# Altium PCB PCB1.PcbDoc (part 2 of 3)
Units mil, origin at the board's own origin, x right, y up, seen from the top; angles counter-clockwise.
Board outline 7874.02 x 3937.01 mil, 2 copper layers (Top Layer, Bottom Layer); 455 components, 299 nets, 1238 pads, 79 vias.
Unrouted connection lines stored in the file: 632.
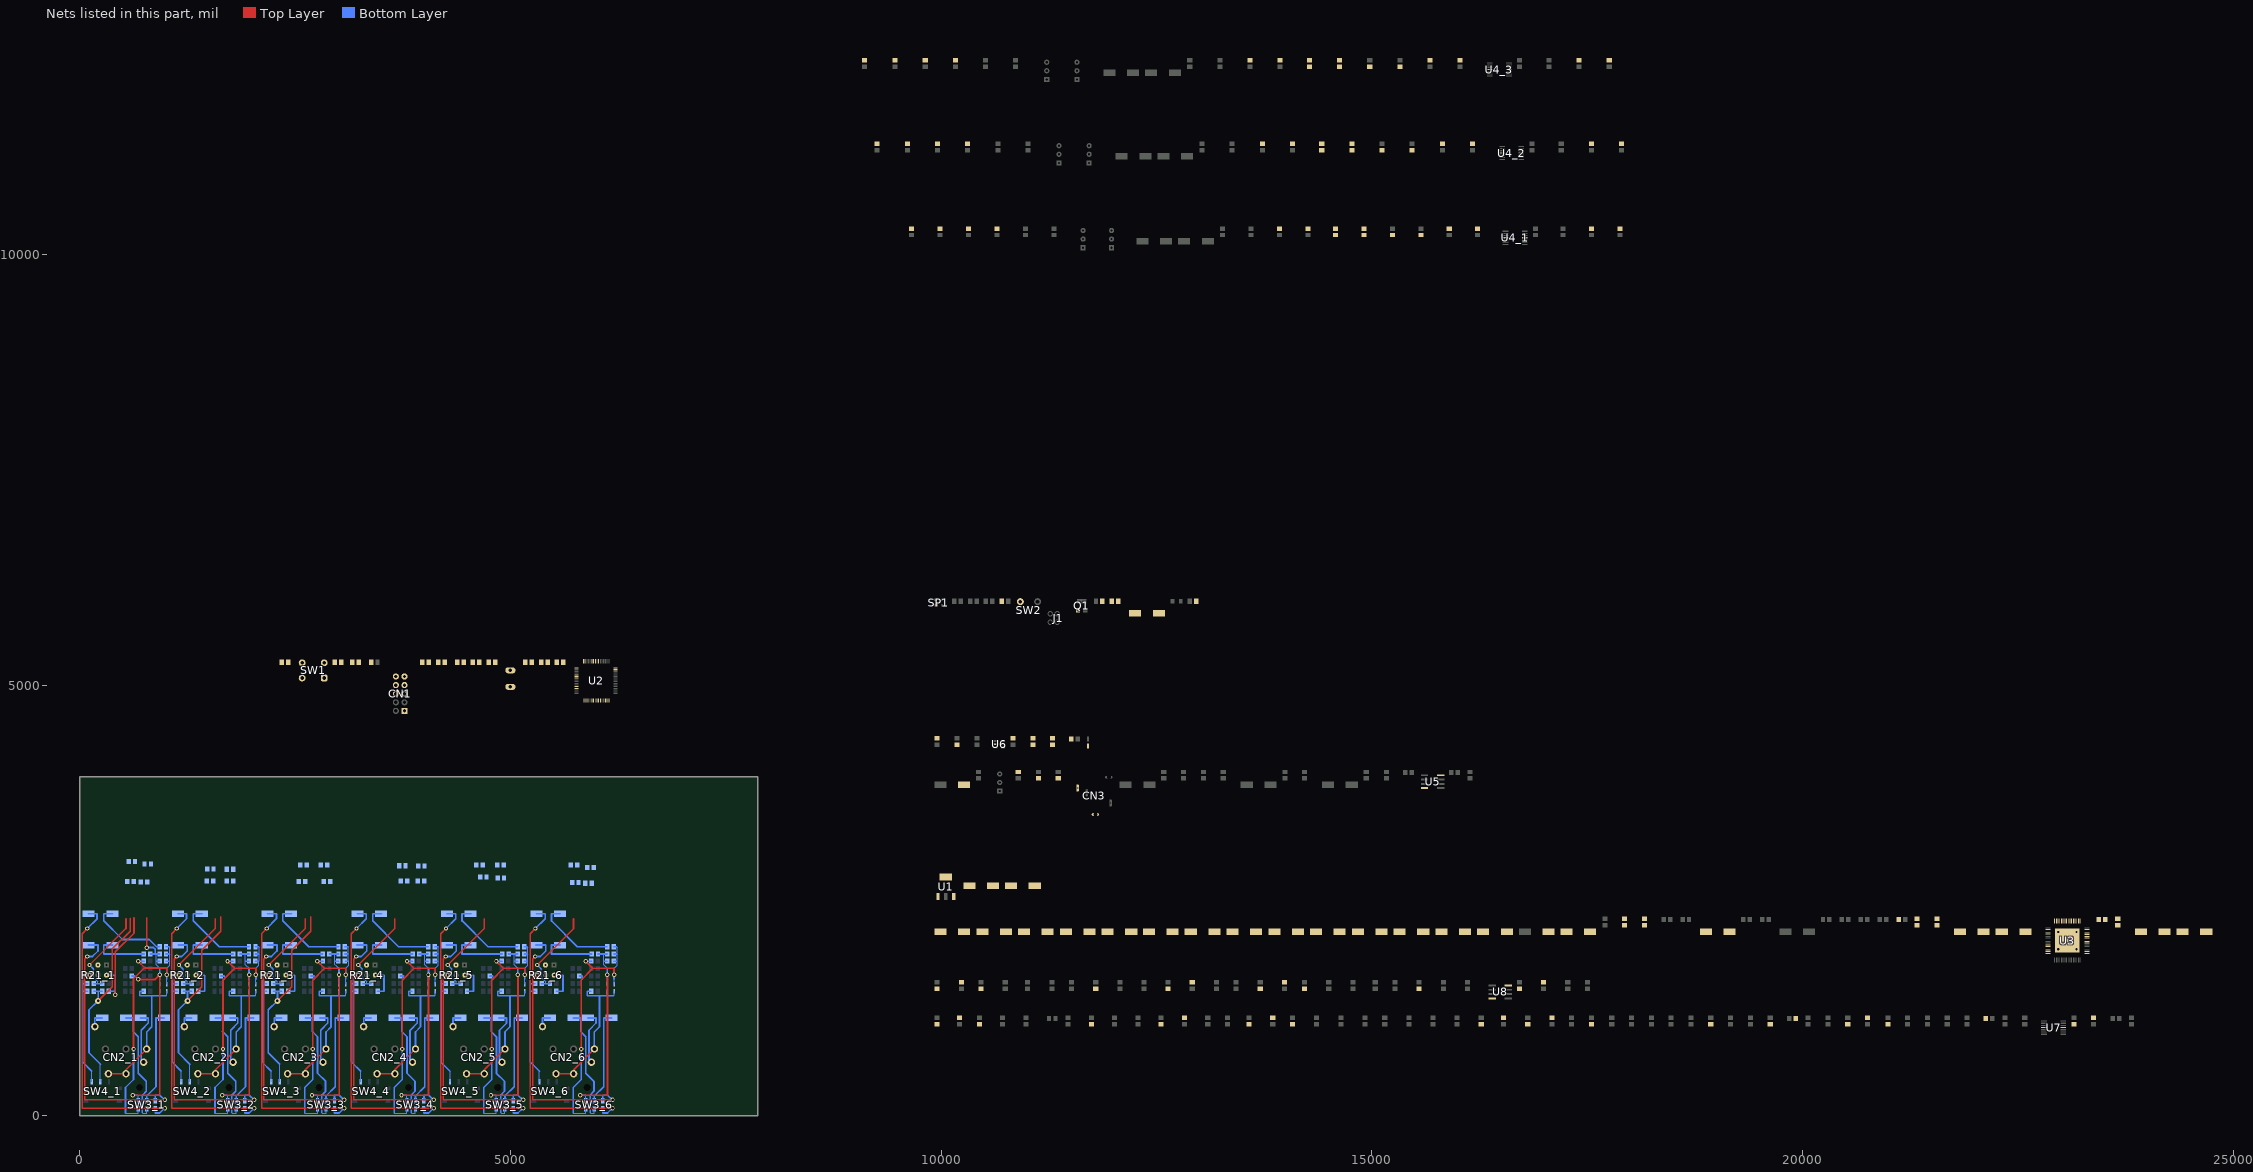
[diagram p2: the nets of this part, all layers, seen from the top]

## Part data
C3 C4 C5 C6 C7 C8 C9 C10 C11 C12 C13 C15 C17_1 C17_2 C17_3 C17_4 C17_5 C17_6 C21 C22 C25 C26 C29 C30 C49_1 C49_2 C49_3 C49_4 C49_5 C49_6 C50_1 C50_2 C50_3 C50_4 C50_5 C50_6 C51_1 C51_2 C51_3 C52_1 C52_2 C52_3 C53_1 C53_2 C53_3 C54_1 C54_2 C54_3 C55_1 C55_2 C55_3 C56_1 C56_2 C56_3 C59_1 C59_2 C59_3 C60_1 C60_2 C60_3 C61 C63 C66 C68 C69 C70 C71 C72 C73 C74 C75 C76 C77 C78 C79 C80 C81 C82 C83 C84 C85 C86 C87 C88 C89_1 C89_2 C89_3 C89_4 C89_5 C89_6 C90_1 C90_2 C90_3 C90_4 C90_5 C90_6 C91_1 C91_2 C91_3 C91_4 C91_5 C91_6 C92_1 C92_2 C92_3 C92_4 C92_5 C92_6 C93_1 C93_2 C93_3 C93_4 C93_5 C93_6: "Capacitor de placas paralelas", tolerancia=X7R, Encapsulado=0805, tension=25V, Valor=100nF
CN1: "STLINK V2 Mini"
D1: library part Led, Color=Verde, Cod. Proveedor=67-1549-1-ND, Encapsulado=SMD, Link=https://www.digikey.com/product-detail/es/SML-LX0603GW-TR/67-1549-1-ND/304360?utm_campaign=buynow&WT.z_cid=ref_octopart_dkc_buynow&utm_medium=aggregator&curr=usd&site=us&utm_source=octopart, Proveedor=Digi-Key
D2 D3_1 D3_2 D3_3 D3_4 D3_5 D3_6 D4_1 D4_2 D4_3 D4_4 D4_5 D4_6: library part "Schottky Diode", Cod. Proveedor=1727-5845-1-ND, Encapsulado=SOD-128, Fabricante=Nexperia, Link=https://www.digikey.com/product-detail/es/PMEG6010EP,115/1727-5845-1-ND/2697507?utm_campaign=buynow&WT.z_cid=ref_octopart_dkc_buynow&utm_medium=aggregator&curr=usd&site=us&utm_source=octopart, Proveedor=Digi-Key
J1: "Conector micro USB tipo B", Cod. Proveedor=CO4821095, Encapsulado="SMD B TYPE SIDE ENTRY", Proveedor=Elemon
L1: library part Inductor, Cod. Proveedor=478-7137-1-ND, Encapsulado=SMD, Fabricante="AVX Corporation", Link=https://www.digikey.com/product-detail/es/L0201R68AHSTR/500/478-7137-1-ND/3455469?utm_campaign=buynow&WT.z_cid=ref_octopart_dkc_buynow&utm_medium=aggregator&curr=usd&site=us&utm_source=octopart, Proveedor=Digi-Key, Valor=0.68nH
Q1: library part NPN, "NPN", Cod. Proveedor=1727-2918-1-ND, Encapsulado=TO-236AB, Fabricante="Nexperia USA Inc.", Link=https://www.digikey.com/products/es?keywords=1727-2918-1-ND, Proveedor=Digi-Key
R1 R8_1 R8_2 R8_3 R8_4 R8_5 R8_6 R9_1 R9_2 R9_3 R9_4 R9_5 R9_6 R10_1 R10_2 R10_3 R10_4 R10_5 R10_6 R24_1 R24_2 R24_3 R25_1 R25_2 R25_3 R26_1 R26_2 R26_3 R27_1 R27_2 R27_3 R28_1 R28_2 R28_3 R29_1 R29_2 R29_3 R30_1 R30_2 R30_3 R31_1 R31_2 R31_3 R34_1 R34_2 R34_3 R35_1 R35_2 R35_3 R36_1 R36_2 R36_3 R37_1 R37_2 R37_3 R38 R39 R40 R41 R42 R43 R44 R45 R46 R47 R48 R50 R75 R78 R81 R82 R83 R84 R85 R86 R87 R88 R89 R92 R93 R94 R95 R96 R97 R98 R99 R100 R103 R104 R105 R106 R107 R108 R109 R110 R111 R114 R115 R116 R117 R118 R119 R120 R121 R122 R125 R126 R127 R128 R129 R130 R131 R132 R133 R136 R137 R138 R139 R140 R141 R142 R143: "Resistencia", tolerancia=10%, Potencia=1/4W
  R1: Valor=10K
  R8_1 R8_2 R8_3 R8_4 R8_5 R8_6 R34_1 R34_2 R34_3 R35_1 R35_2 R35_3 R39 R43 R47 R81 R85 R92 R97 R103 R107 R114 R118 R125 R129 R136 R140: Valor=1K
  R9_1 R9_2 R9_3 R9_4 R9_5 R9_6: Valor=15K
  R10_1 R10_2 R10_3 R10_4 R10_5 R10_6: Valor=8K2
  R24_1 R24_2 R24_3 R25_1 R25_2 R25_3 R28_1 R28_2 R28_3 R29_1 R29_2 R29_3 R30_1 R30_2 R30_3 R31_1 R31_2 R31_3: Valor=1K5
  R26_1 R26_2 R26_3 R27_1 R27_2 R27_3 R36_1 R36_2 R36_3 R37_1 R37_2 R37_3 R84 R95 R106 R117 R128 R139: Valor=47
  R38 R48 R78 R88 R89 R96 R100 R110 R111 R121 R122 R132 R133 R143: Valor=5K6
  R40 R44 R82 R86 R93 R98 R104 R108 R115 R119 R126 R130 R137 R141: Valor=6K8
  R41 R45: Valor=360R
  R42: Valor=4K7
  R46: Valor=47R
  R50: Valor=100R
  R75: Valor=1M
  R83 R87 R94 R99 R105 R109 R116 R120 R127 R131 R138 R142: Valor=360
R2 R3 R4 R5 R6 R7 R11 R22_1 R22_2 R22_3 R22_4 R22_5 R22_6 R23_1 R23_2 R23_3 R23_4 R23_5 R23_6 R51 R52 R53 R54 R55 R56 R57 R58 R59 R60 R61 R62 R63 R64 R65 R66 R67 R68 R69 R70 R71 R72 R73 R74 R76 R77 R79 R80 R90 R91 R101 R102 R112 R113 R123 R124 R134 R135 R144_1 R144_2 R144_3 R144_4 R144_5 R144_6 R145_1 R145_2 R145_3 R145_4 R145_5 R145_6 R146_1 R146_2 R146_3 R146_4 R146_5 R146_6 R147_1 R147_2 R147_3 R147_4 R147_5 R147_6: "Resistencia", tolerancia=5%
  R2: Potencia=1/10W, Valor=330R
  R3: Potencia=1/10W, Valor=47k
  R4 R5 R6 R7: Potencia=1/10W, Valor=22R
  R11: Potencia=1/10W, Valor=220K
  R22_1 R22_2 R22_3 R22_4 R22_5 R22_6 R144_1 R144_2 R144_3 R144_4 R144_5 R144_6 R147_1 R147_2 R147_3 R147_4 R147_5 R147_6: Potencia=1/4W, Valor=1K
  R23_1 R23_2 R23_3 R23_4 R23_5 R23_6: Potencia=1/4W, Valor=15K
  R51 R52 R53 R54 R55 R56 R57 R58 R59 R60 R61 R62 R63 R64 R65 R66 R67 R68 R69 R70 R71 R72 R73 R74 R79 R80 R90 R91 R101 R102 R112 R113 R123 R124 R134 R135: Potencia=1/4W, Valor=1M
  R76: Potencia=1/4W, Valor=33K
  R77: Potencia=1/4W, Valor=1K8
  R145_1 R145_2 R145_3 R145_4 R145_5 R145_6: Potencia=1/4W, Valor=6K8
  R146_1 R146_2 R146_3 R146_4 R146_5 R146_6: Potencia=1/4W, Valor="6 K8"
R12 R13 R14 R15 R16 R17 R18 R19 R20: "Resistencia", Potencia=1/10W, Valor=100R
R21_1 R21_2 R21_3 R21_4 R21_5 R21_6 R32_1 R32_2 R32_3 R33_1 R33_2 R33_3 R49: library part Potenciometer, tolerancia=10%, Potencia=1/4W, Valor=10K
SP1: library part "Double ESD", "Double rail-to-rail ESD protection diode", Cod. Proveedor=1727-3884-1-ND, Encapsulado=SOT-143B, Link=https://www.digikey.com/product-detail/es/PRTR5V0U2X,215/1727-3884-1-ND/1589981?utm_campaign=buynow&WT.z_cid=ref_octopart_dkc_buynow&utm_medium=aggregator&curr=usd&site=us&utm_source=octopart, Proveedor=Digi-Key
SW1 SW5_1 SW5_2 SW5_3 SW5_4 SW5_5 SW5_6: "Pulsador de 4 pines"
  SW5_1 SW5_2 SW5_3 SW5_4 SW5_5 SW5_6: Cod. Proveedor=GH1365-ND, Encapsulado="Montaje en panel, posterior", Fabricante="Grayhill Inc.", Link=https://www.digikey.com/product-detail/es/30-3/GH1365-ND/686796?utm_campaign=buynow&WT.z_cid=ref_octopart_dkc_buynow&utm_medium=aggregator&curr=usd&site=us&utm_source=octopart, Proveedor=Digi-Key
SW4_1 SW4_2 SW4_3 SW4_4 SW4_5 SW4_6: library part SWITCH_3, "Pulsador de 4 pines", Cod. Proveedor=563-1246-1-ND, Encapsulado=SMD, Fabricante="Nidec Copal Electronics", Link=https://www.digikey.com/product-detail/en/nidec-copal-electronics/CFPA-1FB4-A2T/563-1246-1-ND/2357767, Proveedor=Digi-Key
U1: "LDO Regulator", Cod. Proveedor=LM1117IMP-ADJ/NOPBCT-ND, Encapsulado=SOT-223-4, Fabricante="Texas Instruments", Link=https://www.digikey.com/product-detail/es/LM1117IMP-ADJ-NOPB/LM1117IMP-ADJ-NOPBCT-ND/483060?utm_campaign=buynow&WT.z_cid=ref_octopart_dkc_buynow&utm_medium=aggregator&curr=usd&site=us&utm_source=octopart, Proveedor=Digi-Key
U2: library part STM32F4xxR2, Manufacturer=STMicroelectronics, Manufacturer_Part_Number=stm32f4xxr2, _BOOT0="conectado a VDD o DGND a traves de R=10K", _BOOT0=0="0: Main Flash memory is selected as boot space", _BOOT0=1="1: System memory is selected as boot space", _VDD="Capa de 100nF", Cod. Proveedor=497-17428-ND, Encapsulado=64-LQFP, Link=https://www.digikey.com/product-detail/es/STM32F401RBT6/497-17428-ND/4755972?utm_campaign=buynow&WT.z_cid=ref_octopart_dkc_buynow&utm_medium=aggregator&curr=usd&site=us&utm_source=octopart, Proveedor=Digi-Key, Vendor=STMicroelectronics
U3: library part PCM3168A-Q1_PAP_, Manufacturer="Texas Instruments", Manufacturer_Part_Number=PCM3168A-Q1_PAP_64, Vendor="Texas Instruments"
U4_1 U4_2 U4_3 U7: library part Opamp_x4, "Integrado con 4 operacionales", Cod. Proveedor=296-22024-1-ND, Encapsulado=8-SOIC, Fabricante="Texas Instruments", Link=https://www.digikey.com/product-detail/es/OPA2134UA-2K5/296-22024-1-ND/301154?utm_campaign=buynow&WT.z_cid=ref_octopart_dkc_buynow&utm_medium=aggregator&curr=usd&site=us&utm_source=octopart, Proveedor=Digi-Key
U5: "Integrado con 2 operacionales"
U6: "Low IQ Boost/SEPIC/Inverting Converter with 1A, 60V Switch", Cod. Proveedor=LT8330ES6#TRMPBFCT-ND, Encapsulado=TSOT-23-6, Fabricante="Linear Technology/Analog Devices", Link=https://www.digikey.com/product-detail/es/LT8330ES6%2523TRMPBF/LT8330ES6%2523TRMPBFCT-ND/5361671?utm_campaign=buynow&WT.z_cid=ref_octopart_dkc_buynow&utm_medium=aggregator&curr=usd&site=us&utm_source=octopart, Proveedor=Digi-Key
U8: library part Opamp_x2, "Integrado con 2 operacionales", Cod. Proveedor=296-22024-1-ND, Encapsulado=8-SOIC, Fabricante="Texas Instruments", Link=https://www.digikey.com/product-detail/es/OPA2134UA-2K5/296-22024-1-ND/301154?utm_campaign=buynow&WT.z_cid=ref_octopart_dkc_buynow&utm_medium=aggregator&curr=usd&site=us&utm_source=octopart, Proveedor=Digi-Key
Y1: "Resonador cerámico", frecuencia=8MHZ
C1 C2 C14 C16_1 C16_2 C16_3 C16_4 C16_5 C16_6 C18_1 C18_2 C18_3 C18_4 C18_5 C18_6 C19 C20 C23 C24 C27 C28 C31 C32 C33 C34 C35 C36 C37 C38 C39 C40 C41 C42 C43 C44 C45 C46 C47_1 C47_2 C47_3 C47_4 C47_5 C47_6 C48_1 C48_2 C48_3 C48_4 C48_5 C48_6 C57_1 C57_2 C57_3 C58_1 C58_2 C58_3 C62 C64 C65 C67: tension=16V, Valor=10uF
SW2: Cod. Proveedor=EG2615-ND, Encapsulado=SMD, Fabricante=E-Switch, Link=https://www.digikey.com/product-detail/en/e-switch/800SP9B6M6RE/EG2615-ND/502079, Proveedor=Digi-Key
SW3_1 SW3_2 SW3_3 SW3_4 SW3_5 SW3_6: Cod. Proveedor=CKN10722TR-ND, Encapsulado=SMD, Fabricante=C&K, Link=https://www.digikey.com/product-detail/en/c-k/JS202011JAQN/CKN10722TR-ND/6137629, Proveedor=Digi-Key

## Via types
v1: diameter 50, hole 28, Top Layer to Bottom Layer, 69 vias
v2: diameter 70, hole 28, Top Layer to Bottom Layer, 6 vias
v3: diameter 55.12, hole 27.56, Top Layer to Bottom Layer, 4 vias

## Nets (pads, with @x,y where several pads share a name; then routed paths per layer and width w, separated by ;. In a path a pad name is that pad's centre, name@x,y a point inside that pad or via, vN(x,y) a via of type N, cw(c..) or ccw(c..) an arc to the next point about the centre after c; other vN are vias at no path point)
3V3: C2.1 U1.4
3V3_D: C3.1 C4.1 C7.1 C8.1 C9.1 C10.1 C20.1 C22.1 C24.1 C26.1 CN1.7 CN1.8 R2.2 R21_1.3 R21_2.3 R21_3.3 R21_4.3 R21_5.3 R21_6.3 R22_1.2 R22_2.2 R22_3.2 R22_4.2 R22_5.2 R22_6.2 U2.1 U2.13 U2.19 U2.32 U2.48 U2.64 U3.4 U3.12 U3.42 U3.46 | length 3200.6
  Top Layer w20: v1(413.39,1407.48) 413.39,1904.53 629.92,2121.06 629.92,2298.23
  Bottom Layer w20: R21_1.3@312.72,1633.86 413.39,1633.86 413.39,1446.85 ; R22_1.2@337.6,1446.85 413.39,1446.85 ; v1(413.39,1407.48) 413.39,1446.85 ; R21_2.3@1351.11,1633.86 1451.77,1633.86 1451.77,1446.85 R22_2.2@1375.98,1446.85 ; R21_3.3@2394.41,1633.86 2495.08,1633.86 2495.08,1446.85 R22_3.2@2419.29,1446.85 ; R21_4.3@3432.8,1633.86 3533.46,1633.86 3533.46,1446.85 R22_4.2@3457.68,1446.85 ; R21_5.3@4471.19,1633.86 4571.85,1633.86 4571.85,1446.85 R22_5.2@4496.06,1446.85 ; R21_6.3@5509.57,1633.86 5610.24,1633.86 5610.24,1446.85 R22_6.2@5534.45,1446.85
5V: C1.1 C14.1 C15.1 C19.1 C21.1 C23.1 C25.1 C28.1 C29.1 C30.1 C68.1 CN1.9 CN1.10 L1.1 R3.2 R4.1 R51.1 R53.1 R55.1 R57.1 R59.1 R61.1 R63.1 R65.1 R67.1 R69.1 R71.1 R73.1 R79.1 R90.1 R101.1 R112.1 R123.1 R134.1 SP1.4 SW2.2 U1.3 U3.3 U3.14 U3.34 U3.49 U4_1.4 U4_2.4 U4_3.4 U5.4 U6.4 U6.6 U7.4 U8.8
48V: C69.1 D2.1 R75.2 SW5_1.2 SW5_2.2 SW5_3.2 SW5_4.2 SW5_5.2 SW5_6.2
AGND: C1.2 C2.2 C19.2 C21.2 C23.2 C25.2 C28.2 C29.2 C30.2 C31.2 C32.2 C35.2 C36.2 C59_1.2 C59_2.2 C59_3.2 C60_1.2 C60_2.2 C60_3.2 C66.2 C67.2 C68.2 C69.2 C70.2 C73.2 C77.2 C79.2 C82.2 C85.2 C88.2 C91_1.2 C91_2.2 C91_3.2 C91_4.2 C91_5.2 C91_6.2 CN2_1.1 CN2_1.G CN2_1.S CN2_2.1 CN2_2.G CN2_2.S CN2_3.1 CN2_3.G CN2_3.S CN2_4.1 CN2_4.G CN2_4.S CN2_5.1 CN2_5.G CN2_5.S CN2_6.1 CN2_6.G CN2_6.S CN3.1 CN3.2 D3_1.2 D3_2.2 D3_3.2 D3_4.2 D3_5.2 D3_6.2 D4_1.2 D4_2.2 D4_3.2 D4_4.2 D4_5.2 D4_6.2 R47.1 R48.1 R52.2 R54.2 R56.2 R58.2 R60.2 R62.2 R64.2 R66.2 R68.2 R70.2 R72.2 R74.2 R77.1 R80.2 R88.1 R91.2 R100.1 R102.2 R110.1 R113.2 R121.1 R124.2 R132.1 R135.2 R143.1 U1.1 U3.2 U3.16 U3.33 U3.39 U3.40 U3.43 U3.44 U3.45 U3.50 U3.EPAD U4_1.11 U4_2.11 U4_3.11 U5.8 U6.2 U7.11 U8.4 | length 10359.5
  Top Layer w20: CN2_1.S@332.8,489.28 CN2_1.G@537.8,489.28 537.8,536.28 CN2_1.1@777.8,776.28 ; CN2_2.S@1371.18,489.28 CN2_2.G@1576.18,489.28 1576.18,536.28 CN2_2.1@1816.18,776.28 ; CN2_3.S@2414.49,489.28 CN2_3.G@2619.49,489.28 2619.49,536.28 CN2_3.1@2859.49,776.28 ; CN2_4.S@3452.87,489.28 CN2_4.G@3657.87,489.28 3657.87,536.28 CN2_4.1@3897.87,776.28 ; CN2_5.S@4491.26,489.28 CN2_5.G@4696.26,489.28 4696.26,536.28 CN2_5.1@4936.26,776.28 ; CN2_6.S@5529.65,489.28 CN2_6.G@5734.65,489.28 5734.65,536.28 CN2_6.1@5974.65,776.28
  Bottom Layer w10: 930.12,1397.64 D3_1.2@930.12,1445.97 ; 1003.94,1397.64 1008.86,1402.56 D4_1.2@1008.86,1445.97 ; 1966.54,1397.64 D3_2.2@1966.54,1445.97 ; 2040.35,1397.64 2045.28,1402.56 D4_2.2@2045.28,1445.97 ; 3009.84,1397.64 D3_3.2@3009.84,1445.97 ; 3083.66,1397.64 3088.58,1402.56 D4_3.2@3088.58,1445.97 ; 4048.23,1397.64 D3_4.2@4048.23,1445.97 ; 4122.05,1397.64 4126.97,1402.56 D4_4.2@4126.97,1445.97 ; 5086.61,1397.64 D3_5.2@5086.61,1445.97 ; 5160.43,1397.64 5165.35,1402.56 D4_5.2@5165.35,1445.97 ; 6125,1397.64 D3_6.2@6125,1445.97 ; 6198.82,1397.64 6203.74,1402.56 D4_6.2@6203.74,1445.97
  Bottom Layer w15: C91_1.2@745.08,1446.85 698.82,1446.85 698.82,1397.64 930.12,1397.64 1003.94,1397.64 ; C91_2.2@1781.5,1446.85 1735.24,1446.85 1735.24,1397.64 1966.54,1397.64 2040.35,1397.64 ; C91_3.2@2824.8,1446.85 2778.54,1446.85 2778.54,1397.64 3009.84,1397.64 3083.66,1397.64 ; C91_4.2@3863.19,1446.85 3816.93,1446.85 3816.93,1397.64 4048.23,1397.64 4122.05,1397.64 ; C91_5.2@4901.57,1446.85 4855.31,1446.85 4855.31,1397.64 5086.61,1397.64 5160.43,1397.64 ; C91_6.2@5939.96,1446.85 5893.7,1446.85 5893.7,1397.64 6125,1397.64 6198.82,1397.64
  Bottom Layer w20: CN2_1.1@777.8,776.28 777.8,974.65 836.61,1033.46 836.61,1387.8 ; CN2_2.1@1816.18,776.28 1816.18,974.65 1875,1033.46 1875,1387.8 ; CN2_3.1@2859.49,776.28 2859.49,974.65 2918.31,1033.46 2918.31,1387.8 ; CN2_4.1@3897.87,776.28 3897.87,974.65 3956.69,1033.46 3956.69,1387.8 ; CN2_5.1@4936.26,776.28 4936.26,974.65 4995.08,1033.46 4995.08,1387.8 ; CN2_6.1@5974.65,776.28 5974.65,974.65 6033.46,1033.46 6033.46,1387.8
  other v3: 22970,1935 23180,1935 22970,2135 23180,2135
DGND: C3.2 C4.2 C5.1 C6.1 C7.2 C8.2 C9.2 C10.2 C11.2 C12.2 C13.2 C14.2 C15.2 C20.2 C22.2 C24.2 C26.2 C49_1.2 C49_2.2 C49_3.2 C49_4.2 C49_5.2 C49_6.2 C50_1.2 C50_2.2 C50_3.2 C50_4.2 C50_5.2 C50_6.2 CN1.5 CN1.6 J1.5 J1.6 Q1.2 R1.1 R11.1 R21_1.1 R21_2.1 R21_3.1 R21_4.1 R21_5.1 R21_6.1 SP1.1 SW1.2 SW4_1.3 SW4_2.3 SW4_3.3 SW4_4.3 SW4_5.3 SW4_6.3 U2.12 U2.18 U2.31 U2.47 U2.63 U3.11 U3.47 | length 8815
  Bottom Layer w10: SW4_1.3@140.55,397.64 140.55,518.9 ; SW4_2.3@1178.94,397.64 1178.94,518.9 ; SW4_3.3@2222.24,397.64 2222.24,518.9 ; SW4_4.3@3260.63,397.64 3260.63,518.9 ; SW4_5.3@4299.02,397.64 4299.02,518.9 ; SW4_6.3@5337.4,397.64 5337.4,518.9
  Bottom Layer w20: C50_1.2@89.81,1446.85 34.45,1446.85 ; C49_1.2@89.81,1535.43 34.45,1535.43 ; R21_1.1@112.72,1633.86 34.45,1633.86 34.45,1535.43 ; 140.55,518.9 34.45,625 34.45,1446.85 ; C50_2.2@1128.2,1446.85 1072.83,1446.85 ; C49_2.2@1128.2,1535.43 1072.83,1535.43 ; R21_2.1@1151.11,1633.86 1072.83,1633.86 1072.83,1535.43 ; 1178.94,518.9 1072.83,625 1072.83,1446.85 ; C50_3.2@2171.5,1446.85 2116.14,1446.85 ; C49_3.2@2171.5,1535.43 2116.14,1535.43 ; R21_3.1@2194.41,1633.86 2116.14,1633.86 2116.14,1535.43 ; 2222.24,518.9 2116.14,625 2116.14,1446.85 ; C50_4.2@3209.89,1446.85 3154.53,1446.85 ; C49_4.2@3209.89,1535.43 3154.53,1535.43 ; R21_4.1@3232.8,1633.86 3154.53,1633.86 3154.53,1535.43 ; 3260.63,518.9 3154.53,625 3154.53,1446.85 ; C50_5.2@4248.28,1446.85 4192.91,1446.85 ; C49_5.2@4248.28,1535.43 4192.91,1535.43 ; R21_5.1@4271.19,1633.86 4192.91,1633.86 4192.91,1535.43 ; 4299.02,518.9 4192.91,625 4192.91,1446.85 ; C50_6.2@5286.66,1446.85 5231.3,1446.85 ; C49_6.2@5286.66,1535.43 5231.3,1535.43 ; R21_6.1@5309.57,1633.86 5231.3,1633.86 5231.3,1535.43 ; 5337.4,518.9 5231.3,625 5231.3,1446.85 ; 34.45,1446.85 34.45,1535.43 ; 1072.83,1446.85 1072.83,1535.43 ; 2116.14,1446.85 2116.14,1535.43 ; 3154.53,1446.85 3154.53,1535.43 ; 4192.91,1446.85 4192.91,1535.43 ; 5231.3,1446.85 5231.3,1535.43
NetC5_2: C5.2 U2.5 Y1.1
NetC6_2: C6.2 U2.6 Y1.2
NetC11_1: C11.1 C12.1 U2.30
NetC13_1: C13.1 CN1.1 SW1.1 U2.7
NetC16_1_1: C16_1.1 R8_1.1 | length 670.5
  Bottom Layer w20: C16_1.1@383.14,1983.27 280.51,1983.27 280.51,1879.92 R8_1.1@745.08,1879.92
NetC16_1_2: C16_1.2 SW3_1.1 | length 3135.3
  Top Layer w15: 59.06,1722.44 59.06,191.93 63.98,187.01
  Top Layer w20: 59.06,1722.44 59.06,1820.87 v1(88.58,1850.39) ; 63.98,187.01 v1(989.17,187.01)
  Bottom Layer w20: v1(88.58,1850.39) 147.64,1850.39 211.61,1914.37 211.61,1983.27 C16_1.2@104.14,1983.27 C16_1.2@99.14,1983.27 ; SW3_1.1@875.98,175.2 875.98,241.14 930.12,241.14 984.25,187.01 v1(989.17,187.01)
NetC16_2_1: C16_2.1 R8_2.1 | length 670.5
  Bottom Layer w20: C16_2.1@1421.53,1983.27 1318.9,1983.27 1318.9,1879.92 R8_2.1@1783.46,1879.92
NetC16_2_2: C16_2.2 SW3_2.1 | length 3130.3
  Top Layer w15: 1102.36,187.01 1097.44,191.93 1097.44,1712.6 1097.44,1820.87 1102.36,1825.79
  Top Layer w20: 1102.36,187.01 v1(2027.56,187.01) ; 1102.36,1825.79 v1(1126.97,1850.39)
  Bottom Layer w20: v1(1126.97,1850.39) 1186.02,1850.39 1250,1914.37 1250,1983.27 C16_2.2@1142.53,1983.27 ; SW3_2.1@1914.37,175.2 1914.37,241.14 1968.5,241.14 2022.64,187.01 v1(2027.56,187.01)
NetC16_3_1: C16_3.1 R8_3.1 | length 670.5
  Bottom Layer w20: C16_3.1@2459.91,1983.27 2357.28,1983.27 2357.28,1879.92 R8_3.1@2821.85,1879.92
NetC16_3_2: C16_3.2 SW3_3.1 | length 3131.1
  Top Layer w15: 2141.54,187.01 2136.62,191.93 2136.62,1712.6 2136.62,1820.87 2141.54,1825.79
  Top Layer w20: 2141.54,187.01 v1@3066.74,187.01 ; 2141.54,1825.79 v1(2166.15,1850.39)
  Bottom Layer w20: v1(2166.15,1850.39) 2225.2,1850.39 2289.18,1914.37 2289.18,1983.27 C16_3.2@2180.91,1983.27 ; SW3_3.1@2957.68,175.2 2957.68,241.14 3011.81,241.14 3065.94,187.01 v1(3070.87,187.01)
NetC16_4_1: C16_4.1 R8_4.1 | length 670.5
  Bottom Layer w20: C16_4.1@3503.22,1983.27 3400.59,1983.27 3400.59,1879.92 R8_4.1@3865.16,1879.92
NetC16_4_2: C16_4.2 SW3_4.1 | length 3135.3
  Top Layer w15: 3184.85,187.01 3179.93,191.93 3179.93,1712.6 3179.93,1820.87 3184.85,1825.79
  Top Layer w20: 3184.85,187.01 v1@4110.05,187.01 ; 3184.85,1825.79 v1(3209.46,1850.39)
  Bottom Layer w20: v1(3209.46,1850.39) 3268.51,1850.39 3332.49,1914.37 3332.49,1983.27 3225.02,1983.27 C16_4.2@3220.02,1983.27 ; SW3_4.1@3996.06,175.2 3996.06,241.14 4050.2,241.14 4104.33,187.01 v1(4109.25,187.01)
NetC16_5_1: C16_5.1 R8_5.1 | length 670.5
  Bottom Layer w20: C16_5.1@4541.61,1983.27 4438.98,1983.27 4438.98,1879.92 R8_5.1@4903.54,1879.92
NetC16_5_2: C16_5.2 SW3_5.1 | length 3135.3
  Top Layer w15: 4223.24,187.01 4218.31,191.93 4218.31,1712.6 4218.31,1820.87 4223.24,1825.79
  Top Layer w20: 4223.24,187.01 v1@5148.43,187.01 ; 4223.24,1825.79 v1(4247.84,1850.39)
  Bottom Layer w20: v1(4247.84,1850.39) 4306.9,1850.39 4370.87,1914.37 4370.87,1983.27 4263.4,1983.27 C16_5.2@4258.4,1983.27 ; SW3_5.1@5034.45,175.2 5034.45,241.14 5088.58,241.14 5142.72,187.01 v1(5147.64,187.01)
NetC16_6_1: C16_6.1 R8_6.1 | length 670.5
  Bottom Layer w20: C16_6.1@5579.99,1983.27 5477.36,1983.27 5477.36,1879.92 R8_6.1@5941.93,1879.92
NetC16_6_2: C16_6.2 SW3_6.1 | length 3135.3
  Top Layer w15: 5261.62,187.01 5256.7,191.93 5256.7,1712.6 5256.7,1820.87 5261.62,1825.79
  Top Layer w20: 5261.62,187.01 v1@6186.82,187.01 ; 5261.62,1825.79 v1(5286.23,1850.39)
  Bottom Layer w20: v1(5286.23,1850.39) 5345.28,1850.39 5409.26,1914.37 5409.26,1983.27 5301.79,1983.27 C16_6.2@5296.79,1983.27 ; SW3_6.1@6072.83,175.2 6072.83,241.14 6126.97,241.14 6181.1,187.01 v1(6186.02,187.01)
NetC17_1_1: C17_1.1 D3_1.1 R8_1.2 R9_1.2 R51.2 R52.1 R81.1 R144_1.1 SW3_1.3 | length 3264.3
  Top Layer w20: v1(615.16,241.14) 930.12,241.14 v1(930.12,1638.78) 875.98,1584.65 v1(679.13,1584.65) ; v1(777.56,1953.74) 777.56,2298.23
  Bottom Layer w10: 674.21,241.14 679.13,236.22 SW3_1.3@679.13,175.2 ; 890.75,1879.92 885.83,1875 885.83,1756.89 930.12,1712.6 ; D3_1.1@930.12,1526.47 930.12,1579.72
  Bottom Layer w20: R144_1.1@603.35,1624.02 639.76,1624.02 v1(679.13,1584.65) ; v1(615.16,241.14) 674.21,241.14 ; v1(777.56,1953.74) 856.3,1953.74 875.98,1934.06 875.98,1879.92 ; R8_1.2@819.88,1879.92 875.98,1879.92 ; 890.75,1796.26 C17_1.1@927.17,1796.26 ; 890.75,1879.92 R9_1.2@927.17,1879.92 875.98,1879.92 ; 930.12,1579.72 v1(930.12,1638.78) 930.12,1712.6
NetC17_1_2: C17_1.2 D4_1.1 R9_1.1 R10_1.2 R53.2 R54.1 R85.1 R147_1.1 SW3_1.6 | length 3066.9
  Top Layer w20: v1@625,777.56 625,1594.15 748.37,1717.52 1008.86,1717.52 v1(1008.86,1638.78) ; v1(679.13,1796.26) 757.87,1717.52
  Bottom Layer w10: 531.5,34.45 536.42,29.53 679.13,29.53 SW3_1.6@679.13,80.71 ; D4_1.1@1008.86,1526.47 1008.86,1589.57 ; 1008.86,1712.6 1043.31,1747.05 1043.31,1801.18 ; 1038.39,1796.26 1043.31,1801.18 ; 1038.39,1879.92 1043.31,1875 ; 1038.39,1963.58 1043.31,1958.66 1043.31,1875 ; 1043.31,1801.18 1043.31,1875
  Bottom Layer w20: 531.5,34.45 531.5,329.72 625,423.23 v1@625,777.56 ; v1(679.13,1796.26) R147_1.1@745.08,1796.26 ; C17_1.2@1001.97,1796.26 1038.39,1796.26 ; R9_1.1@1001.97,1879.92 1038.39,1879.92 ; R10_1.2@1001.97,1963.58 1038.39,1963.58 ; 1008.86,1589.57 v1(1008.86,1638.78) 1008.86,1712.6
  other v1: 625,776.28
NetC17_2_1: C17_2.1 D3_2.1 R8_2.2 R9_2.2 R55.2 R56.1 R92.1 R144_2.1 SW3_2.3 | length 2476.3
  Top Layer w20: v1(1653.54,241.14) 1968.5,241.14 v1@1968.5,1638.78
  Bottom Layer w9: 1676.18,1624.02 1681.1,1619.09 1681.1,1579.72
  Bottom Layer w10: 1712.6,241.14 1717.52,236.22 SW3_2.3@1717.52,175.2 ; 1922.24,1756.89 1966.54,1712.6 ; 1924.21,1756.89 1924.21,1875 1929.13,1879.92 ; D3_2.1@1966.54,1526.47 1966.54,1579.72
  Bottom Layer w20: R144_2.1@1639.76,1624.02 1676.18,1624.02 ; v1(1653.54,241.14) 1712.6,241.14 ; R8_2.2@1858.27,1879.92 R9_2.2@1965.55,1879.92 1929.13,1879.92 ; 1929.13,1796.26 C17_2.1@1965.55,1796.26 ; 1966.54,1579.72 v1(1966.54,1638.78) 1966.54,1712.6
NetC17_2_2: C17_2.2 D4_2.1 R9_2.1 R10_2.2 R57.2 R58.1 R97.1 R147_2.1 SW3_2.6 | length 3055.5
  Top Layer w20: 1661.42,1574.8 1799.21,1712.6 ; v1@1663.39,777.56 1663.39,1574.8 ; v1(1715.55,1796.26) 1799.21,1712.6 ; v1(2045.28,1638.78) 2045.28,1712.6 1799.21,1712.6
  Bottom Layer w10: 1569.88,34.45 1574.8,29.53 1717.52,29.53 SW3_2.6@1717.52,80.71 ; D4_2.1@2045.28,1526.47 2045.28,1589.57 ; 2045.28,1712.6 2079.72,1747.05 2079.72,1801.18 2074.8,1796.26 ; 2076.77,1879.92 2081.69,1875 ; 2076.77,1963.58 2081.69,1958.66 2081.69,1875 ; 2081.69,1801.18 2081.69,1875
  Bottom Layer w20: 1569.88,34.45 1569.88,329.72 1663.39,423.23 v1@1663.39,777.56 ; v1(1715.55,1796.26) R147_2.1@1781.5,1796.26 ; C17_2.2@2038.39,1796.26 2074.8,1796.26 ; R9_2.1@2040.35,1879.92 2076.77,1879.92 ; R10_2.2@2040.35,1963.58 2076.77,1963.58 ; 2045.28,1589.57 v1(2045.28,1638.78) 2045.28,1712.6
  other v1: 1663.39,776.28
NetC17_3_1: C17_3.1 D3_3.1 R8_3.2 R9_3.2 R59.2 R60.1 R144_3.1 SW3_3.3 | length 2476.3
  Top Layer w20: v1(2696.85,241.14) 3011.81,241.14 v1@3011.81,1638.78
  Bottom Layer w9: 2719.49,1624.02 2724.41,1619.09 2724.41,1579.72
  Bottom Layer w10: 2755.91,241.14 2760.83,236.22 SW3_3.3@2760.83,175.2 ; 2962.6,1756.89 2962.6,1875 2967.52,1879.92 ; 2965.55,1756.89 3009.84,1712.6 ; D3_3.1@3009.84,1526.47 3009.84,1579.72
  Bottom Layer w20: R144_3.1@2683.07,1624.02 2719.49,1624.02 ; v1(2696.85,241.14) 2755.91,241.14 ; R8_3.2@2896.65,1879.92 R9_3.2@3003.94,1879.92 2967.52,1879.92 ; 2967.52,1796.26 C17_3.1@3003.94,1796.26 ; 3009.84,1579.72 v1(3009.84,1638.78) 3009.84,1712.6
NetC17_3_2: C17_3.2 D4_3.1 R9_3.1 R10_3.2 R61.2 R62.1 R107.1 R147_3.1 SW3_3.6 | length 3055.5
  Top Layer w20: 2704.72,1574.8 2842.52,1712.6 ; v1@2706.69,777.56 2706.69,1574.8 ; v1(2758.86,1796.26) 2842.52,1712.6 ; v1(3088.58,1638.78) 3088.58,1712.6 2842.52,1712.6
  Bottom Layer w10: 2613.19,34.45 2618.11,29.53 2760.83,29.53 SW3_3.6@2760.83,80.71 ; D4_3.1@3088.58,1526.47 3088.58,1589.57 ; 3088.58,1712.6 3123.03,1747.05 3123.03,1801.18 3118.11,1796.26 ; 3115.16,1879.92 3120.08,1875 ; 3115.16,1963.58 3120.08,1958.66 3120.08,1875 ; 3120.08,1801.18 3120.08,1875
  Bottom Layer w20: 2613.19,34.45 2613.19,329.72 2706.69,423.23 v1@2706.69,777.56 ; v1(2758.86,1796.26) R147_3.1@2824.8,1796.26 ; R9_3.1@3078.74,1879.92 3115.16,1879.92 ; R10_3.2@3078.74,1963.58 3115.16,1963.58 ; C17_3.2@3081.69,1796.26 3118.11,1796.26 ; 3088.58,1589.57 v1(3088.58,1638.78) 3088.58,1712.6
  other v1: 2706.69,776.28
NetC17_4_1: C17_4.1 D3_4.1 R8_4.2 R9_4.2 R63.2 R64.1 R118.1 R144_4.1 SW3_4.3 | length 2476.3
  Top Layer w20: v1(3735.24,241.14) 4050.2,241.14 v1@4050.2,1638.78
  Bottom Layer w9: 3757.87,1624.02 3762.8,1619.09 3762.8,1579.72
  Bottom Layer w10: 3794.29,241.14 3799.21,236.22 SW3_4.3@3799.21,175.2 ; 4003.94,1756.89 4048.23,1712.6 ; 4005.91,1756.89 4005.91,1875 4010.83,1879.92 ; D3_4.1@4048.23,1526.47 4048.23,1579.72
  Bottom Layer w20: R144_4.1@3721.46,1624.02 3757.87,1624.02 ; v1(3735.24,241.14) 3794.29,241.14 ; R8_4.2@3939.96,1879.92 R9_4.2@4047.24,1879.92 4010.83,1879.92 ; 4010.83,1796.26 C17_4.1@4047.24,1796.26 ; 4048.23,1579.72 v1(4048.23,1638.78) 4048.23,1712.6
NetC17_4_2: C17_4.2 D4_4.1 R9_4.1 R10_4.2 R65.2 R66.1 R114.1 R147_4.1 SW3_4.6 | length 3055.5
  Top Layer w20: 3743.11,1574.8 3880.91,1712.6 ; v1@3745.08,777.56 3745.08,1574.8 ; v1@3797.24,1796.26 3880.91,1712.6 ; v1(4126.97,1638.78) 4126.97,1712.6 3880.91,1712.6
  Bottom Layer w10: 3651.57,34.45 3656.5,29.53 3799.21,29.53 SW3_4.6@3799.21,80.71 ; D4_4.1@4126.97,1526.47 4126.97,1589.57 ; 4126.97,1712.6 4161.42,1747.05 4161.42,1801.18 ; 4158.46,1796.26 4163.39,1801.18 4163.39,1875 ; 4158.46,1879.92 4163.39,1875 ; 4158.46,1963.58 4163.39,1958.66 4163.39,1875
  Bottom Layer w20: 3651.57,34.45 3651.57,329.72 3745.08,423.23 v1@3745.08,777.56 ; v1(3799.21,1796.26) R147_4.1@3865.16,1796.26 ; C17_4.2@4122.05,1796.26 4158.46,1796.26 ; R9_4.1@4122.05,1879.92 4158.46,1879.92 ; R10_4.2@4122.05,1963.58 4158.46,1963.58 ; 4126.97,1589.57 v1(4126.97,1638.78) 4126.97,1712.6
  other v1: 3745.08,776.28
NetC17_5_1: C17_5.1 D3_5.1 R8_5.2 R9_5.2 R67.2 R68.1 R125.1 R144_5.1 SW3_5.3 | length 2476.3
  Top Layer w20: v1(4773.62,241.14) 5088.58,241.14 v1@5088.58,1638.78
  Bottom Layer w9: 4796.26,1624.02 4801.18,1619.09 4801.18,1579.72
  Bottom Layer w10: 4832.68,241.14 4837.6,236.22 SW3_5.3@4837.6,175.2 ; 5042.32,1756.89 5086.61,1712.6 ; 5044.29,1756.89 5044.29,1875 5049.21,1879.92 ; D3_5.1@5086.61,1526.47 5086.61,1579.72
  Bottom Layer w20: R144_5.1@4759.84,1624.02 4796.26,1624.02 ; v1(4773.62,241.14) 4832.68,241.14 ; R8_5.2@4978.35,1879.92 R9_5.2@5085.63,1879.92 5049.21,1879.92 ; 5049.21,1796.26 C17_5.1@5085.63,1796.26 ; 5086.61,1579.72 v1(5086.61,1638.78) 5086.61,1712.6
NetC17_5_2: C17_5.2 D4_5.1 R9_5.1 R10_5.2 R69.2 R70.1 R129.1 R147_5.1 SW3_5.6 | length 3055.5
  Top Layer w20: 4781.5,1574.8 4919.29,1712.6 ; v1@4783.46,777.56 4783.46,1574.8 ; v1@4835.63,1796.26 4919.29,1712.6 ; v1(5165.35,1638.78) 5165.35,1712.6 4919.29,1712.6
  Bottom Layer w10: 4689.96,34.45 4694.88,29.53 4837.6,29.53 SW3_5.6@4837.6,80.71 ; D4_5.1@5165.35,1526.47 5165.35,1589.57 ; 5165.35,1712.6 5199.8,1747.05 5199.8,1801.18 ; 5196.85,1796.26 5201.77,1801.18 5201.77,1875 ; 5196.85,1879.92 5201.77,1875 ; 5196.85,1963.58 5201.77,1958.66 5201.77,1875
  Bottom Layer w20: 4689.96,34.45 4689.96,329.72 4783.46,423.23 v1@4783.46,777.56 ; v1(4837.6,1796.26) R147_5.1@4903.54,1796.26 ; C17_5.2@5160.43,1796.26 5196.85,1796.26 ; R9_5.1@5160.43,1879.92 5196.85,1879.92 ; R10_5.2@5160.43,1963.58 5196.85,1963.58 ; 5165.35,1589.57 v1(5165.35,1638.78) 5165.35,1712.6
  other v1: 4783.46,776.28
NetC17_6_1: C17_6.1 D3_6.1 R8_6.2 R9_6.2 R71.2 R72.1 R136.1 R144_6.1 SW3_6.3 | length 2476.3
  Top Layer w20: v1(5812.01,241.14) 6126.97,241.14 v1@6126.97,1638.78
  Bottom Layer w9: 5834.65,1624.02 5839.57,1619.09 5839.57,1579.72
  Bottom Layer w10: 5871.06,241.14 5875.98,236.22 SW3_6.3@5875.98,175.2 ; 6080.71,1756.89 6125,1712.6 ; 6082.68,1756.89 6082.68,1875 6087.6,1879.92 ; D3_6.1@6125,1526.47 6125,1579.72
  Bottom Layer w20: R144_6.1@5798.23,1624.02 5834.65,1624.02 ; v1(5812.01,241.14) 5871.06,241.14 ; R8_6.2@6016.73,1879.92 R9_6.2@6124.02,1879.92 6087.6,1879.92 ; 6087.6,1796.26 C17_6.1@6124.02,1796.26 ; 6125,1579.72 v1(6125,1638.78) 6125,1712.6
NetC17_6_2: C17_6.2 D4_6.1 R9_6.1 R10_6.2 R73.2 R74.1 R140.1 R147_6.1 SW3_6.6 | length 3055.5
  Top Layer w20: 5819.88,1574.8 5957.68,1712.6 ; v1@5821.85,777.56 5821.85,1574.8 ; v1@5874.02,1796.26 5957.68,1712.6 ; v1(6203.74,1638.78) 6203.74,1712.6 5957.68,1712.6
  Bottom Layer w10: 5728.35,34.45 5733.27,29.53 5875.98,29.53 SW3_6.6@5875.98,80.71 ; D4_6.1@6203.74,1526.47 6203.74,1589.57 ; 6203.74,1712.6 6238.19,1747.05 6238.19,1801.18 ; 6235.24,1796.26 6240.16,1801.18 6240.16,1875 ; 6235.24,1879.92 6240.16,1875 ; 6235.24,1963.58 6240.16,1958.66 6240.16,1875
  Bottom Layer w20: 5728.35,34.45 5728.35,329.72 5821.85,423.23 v1@5821.85,777.56 ; v1(5875.98,1796.26) R147_6.1@5941.93,1796.26 ; C17_6.2@6198.82,1796.26 6235.24,1796.26 ; R9_6.1@6198.82,1879.92 6235.24,1879.92 ; R10_6.2@6198.82,1963.58 6235.24,1963.58 ; 6203.74,1589.57 v1(6203.74,1638.78) 6203.74,1712.6
  other v1: 5821.85,776.28
NetC18_1_1: C18_1.1 R10_1.1 | length 957.3
  Bottom Layer w20: C18_1.1@383.14,2347.44 C18_1.1@378.14,2347.44 280.51,2347.44 280.51,2263.78 497.05,2047.24 807.09,2047.24 890.75,1963.58 R10_1.1@927.17,1963.58
NetC18_1_2: C18_1.2 SW3_1.4 | length 3571.5
  Top Layer w15: 34.45,88.58 29.53,93.5 29.53,2116.14 34.45,2121.06
  Top Layer w20: 34.45,88.58 v1(989.17,88.58) ; 34.45,2121.06 v1(88.58,2175.2)
  Bottom Layer w20: v1(88.58,2175.2) 201.77,2288.39 201.77,2347.44 C18_1.2@99.14,2347.44 ; SW3_1.4@875.98,80.71 875.98,34.45 930.12,34.45 984.25,88.58 v1(989.17,88.58)
NetC18_2_1: C18_2.1 R10_2.1 | length 957.3
  Bottom Layer w20: C18_2.1@1421.53,2347.44 1318.9,2347.44 1318.9,2263.78 1619.09,1963.58 R10_2.1@1965.55,1963.58
NetC18_2_2: C18_2.2 SW3_2.4 | length 3571.5
  Top Layer w15: 1072.83,88.58 1067.91,93.5 1067.91,2116.14 1072.83,2121.06
  Top Layer w20: 1072.83,88.58 v1(2027.56,88.58) ; 1072.83,2121.06 v1(1126.97,2175.2)
  Bottom Layer w20: v1(1126.97,2175.2) 1240.16,2288.39 1240.16,2347.44 C18_2.2@1137.53,2347.44 ; SW3_2.4@1914.37,80.71 1914.37,34.45 1968.5,34.45 2022.64,88.58 v1(2027.56,88.58)
NetC18_3_1: C18_3.1 R10_3.1 | length 957.3
  Bottom Layer w20: C18_3.1@2459.91,2347.44 2357.28,2347.44 2357.28,2263.78 2657.48,1963.58 R10_3.1@3003.94,1963.58
NetC18_3_2: C18_3.2 SW3_3.4 | length 3571.5
  Top Layer w15: 2116.14,88.58 2111.22,93.5 2111.22,2116.14 2116.14,2121.06
  Top Layer w20: 2116.14,88.58 v1(3070.87,88.58) ; 2116.14,2121.06 v1(2170.28,2175.2)
  Bottom Layer w20: v1(2170.28,2175.2) 2283.46,2288.39 2283.46,2347.44 C18_3.2@2180.83,2347.44 ; SW3_3.4@2957.68,80.71 2957.68,34.45 3011.81,34.45 3065.95,88.58 v1(3070.87,88.58)
NetC18_4_1: C18_4.1 R10_4.1 | length 957.3
  Bottom Layer w20: C18_4.1@3503.22,2347.44 3400.59,2347.44 3400.59,2263.78 3700.79,1963.58 R10_4.1@4047.24,1963.58
NetC18_4_2: C18_4.2 SW3_4.4 | length 3571.5
  Top Layer w15: 3159.53,88.58 3154.61,93.5 3154.61,2116.14 3159.53,2121.06
  Top Layer w20: 3159.53,88.58 v1@4114.25,88.58 ; 3159.53,2121.06 v1(3213.66,2175.2)
  Bottom Layer w20: v1(3213.66,2175.2) 3326.85,2288.39 3326.85,2347.44 C18_4.2@3224.22,2347.44 ; SW3_4.4@3996.06,80.71 3996.06,34.45 4050.2,34.45 4104.33,88.58 v1(4109.25,88.58)
NetC18_5_1: C18_5.1 R10_5.1 | length 957.3
  Bottom Layer w20: C18_5.1@4541.61,2347.44 4438.98,2347.44 4438.98,2263.78 4739.17,1963.58 R10_5.1@5085.63,1963.58
NetC18_5_2: C18_5.2 SW3_5.4 | length 3571.5
  Top Layer w15: 4197.91,88.58 4192.99,93.5 4192.99,2116.14 4197.91,2121.06
  Top Layer w20: 4197.91,88.58 v1@5152.64,88.58 ; 4197.91,2121.06 v1(4252.05,2175.2)
  Bottom Layer w20: v1(4252.05,2175.2) 4365.24,2288.39 4365.24,2347.44 C18_5.2@4262.61,2347.44 ; SW3_5.4@5034.45,80.71 5034.45,34.45 5088.58,34.45 5142.72,88.58 v1(5147.64,88.58)
NetC18_6_1: C18_6.1 R10_6.1 | length 957.3
  Bottom Layer w20: C18_6.1@5579.99,2347.44 5477.36,2347.44 5477.36,2263.78 5777.56,1963.58 R10_6.1@6124.02,1963.58
NetC18_6_2: C18_6.2 SW3_6.4 | length 3571.5
  Top Layer w15: 5236.3,88.58 5231.38,93.5 5231.38,2116.14 5236.3,2121.06
  Top Layer w20: 5236.3,88.58 v1@6191.02,88.58 ; 5236.3,2121.06 v1(5290.43,2175.2)
  Bottom Layer w20: v1(5290.43,2175.2) 5403.62,2288.39 5403.62,2347.44 C18_6.2@5300.99,2347.44 ; SW3_6.4@6072.83,80.71 6072.83,34.45 6126.97,34.45 6181.1,88.58 v1(6186.02,88.58)
NetC32_1: C32.1 U3.59
NetC33_1: C33.1 C53_1.1 R24_1.2 R26_1.2
NetC33_2: C33.2 U3.52
NetC34_1: C34.1 C53_1.2 R28_1.1 R30_1.2 R36_1.2
NetC34_2: C34.2 U3.51
NetC35_1: C35.1 U3.15
NetC36_1: C36.1 U3.60
NetC37_1: C37.1 C54_1.1 R25_1.2 R27_1.2
NetC37_2: C37.2 U3.54
NetC38_1: C38.1 C54_1.2 R29_1.1 R31_1.2 R37_1.2
NetC38_2: C38.2 U3.53
NetC39_1: C39.1 C53_2.1 R24_2.2 R26_2.2
NetC39_2: C39.2 U3.56
NetC40_1: C40.1 C53_2.2 R28_2.1 R30_2.2 R36_2.2
NetC40_2: C40.2 U3.55
NetC41_1: C41.1 C54_2.1 R25_2.2 R27_2.2
NetC41_2: C41.2 U3.58
NetC42_1: C42.1 C54_2.2 R29_2.1 R31_2.2 R37_2.2
NetC42_2: C42.2 U3.57
NetC43_1: C43.1 C53_3.1 R24_3.2 R26_3.2
NetC43_2: C43.2 U3.62
NetC44_1: C44.1 C53_3.2 R28_3.1 R30_3.2 R36_3.2
NetC44_2: C44.2 U3.61
NetC45_1: C45.1 C54_3.1 R25_3.2 R27_3.2
NetC45_2: C45.2 U3.64
NetC46_1: C46.1 C54_3.2 R29_3.1 R31_3.2 R37_3.2
NetC46_2: C46.2 U3.63
NetC47_1_1: C47_1.1 SW3_1.2 | length 1099.2
  Bottom Layer w20: SW3_1.2@777.56,175.2 777.56,231.3 885.83,339.57 885.83,1136.81 C47_1.1@978.54,1136.81
NetC47_1_2: C47_1.2 CN2_1.R | length 651.6
  Bottom Layer w20: C47_1.2@704.54,1136.81 797.24,1136.81 797.24,1077.76 715.3,995.81 715.3,650.78 CN2_1.R@742.8,623.28
NetC47_2_1: C47_2.1 SW3_2.2 | length 1099.2
  Bottom Layer w20: SW3_2.2@1815.94,175.2 1815.94,231.3 1924.21,339.57 1924.21,1136.81 C47_2.1@2016.92,1136.81
NetC47_2_2: C47_2.2 CN2_2.R | length 651.6
  Bottom Layer w20: C47_2.2@1742.92,1136.81 1835.63,1136.81 1835.63,1077.76 1753.68,995.81 1753.68,650.78 CN2_2.R@1781.18,623.28
NetC47_3_1: C47_3.1 SW3_3.2 | length 1099.2
  Bottom Layer w20: SW3_3.2@2859.25,175.2 2859.25,231.3 2967.52,339.57 2967.52,1136.81 C47_3.1@3060.23,1136.81
NetC47_3_2: C47_3.2 CN2_3.R | length 651.6
  Bottom Layer w20: C47_3.2@2786.23,1136.81 2878.94,1136.81 2878.94,1077.76 2796.99,995.81 2796.99,650.78 CN2_3.R@2824.49,623.28
NetC47_4_1: C47_4.1 SW3_4.2 | length 1099.2
  Bottom Layer w20: SW3_4.2@3897.64,175.2 3897.64,231.3 4005.91,339.57 4005.91,1136.81 C47_4.1@4098.61,1136.81
NetC47_4_2: C47_4.2 CN2_4.R | length 651.6
  Bottom Layer w20: C47_4.2@3824.61,1136.81 3917.32,1136.81 3917.32,1077.76 3835.37,995.81 3835.37,650.78 CN2_4.R@3862.87,623.28
NetC47_5_1: C47_5.1 SW3_5.2 | length 1099.2
  Bottom Layer w20: SW3_5.2@4936.02,175.2 4936.02,231.3 5044.29,339.57 5044.29,1136.81 C47_5.1@5137,1136.81
NetC47_5_2: C47_5.2 CN2_5.R | length 651.6
  Bottom Layer w20: C47_5.2@4863,1136.81 4955.71,1136.81 4955.71,1077.76 4873.76,995.81 4873.76,650.78 CN2_5.R@4901.26,623.28
NetC47_6_1: C47_6.1 SW3_6.2 | length 1099.2
  Bottom Layer w20: SW3_6.2@5974.41,175.2 5974.41,231.3 6082.68,339.57 6082.68,1136.81 C47_6.1@6175.39,1136.81
NetC47_6_2: C47_6.2 CN2_6.R | length 651.6
  Bottom Layer w20: C47_6.2@5901.39,1136.81 5994.09,1136.81 5994.09,1077.76 5912.15,995.81 5912.15,650.78 CN2_6.R@5939.65,623.28
NetC48_1_1: C48_1.1 SW3_1.5 | length 1367.5
  Bottom Layer w10: 614.54,1136.81 619.54,1131.81 619.54,1092.55 620.08,1092.01 620.08,979.33 ; 728.35,34.45 733.27,29.53 777.56,29.53 SW3_1.5@777.56,80.71
  Bottom Layer w15: 728.35,34.45 728.35,241.14
  Bottom Layer w20: C48_1.1@535.62,1136.81 614.54,1136.81 ; 620.08,979.33 679.13,920.28 679.13,497.05 772.64,403.54 772.64,285.43 728.35,241.14
NetC48_1_2: C48_1.2 CN2_1.T | length 186.4
  Bottom Layer w20: CN2_1.T@175.8,1036.28 175.8,1136.81 C48_1.2@261.62,1136.81
NetC48_2_1: C48_2.1 SW3_2.5 | length 1367.5
  Bottom Layer w10: 1652.92,1136.81 1657.92,1131.81 1657.92,1092.55 1658.46,1092.01 1658.46,979.33 ; 1766.73,34.45 1771.65,29.53 1815.94,29.53 SW3_2.5@1815.94,80.71
  Bottom Layer w15: 1766.73,34.45 1766.73,241.14
  Bottom Layer w20: C48_2.1@1574.01,1136.81 1652.92,1136.81 ; 1658.46,979.33 1717.52,920.28 1717.52,497.05 1811.02,403.54 1811.02,285.43 1766.73,241.14
NetC48_2_2: C48_2.2 CN2_2.T | length 186.4
  Bottom Layer w20: CN2_2.T@1214.18,1036.28 1214.18,1136.81 C48_2.2@1300.01,1136.81
NetC48_3_1: C48_3.1 SW3_3.5 | length 1367.5
  Bottom Layer w10: 2696.23,1136.81 2701.23,1131.81 2701.23,1092.55 2701.77,1092.01 2701.77,979.33 ; 2810.04,34.45 2814.96,29.53 2859.25,29.53 SW3_3.5@2859.25,80.71
  Bottom Layer w15: 2810.04,34.45 2810.04,241.14
  Bottom Layer w20: C48_3.1@2617.32,1136.81 2696.23,1136.81 ; 2701.77,979.33 2760.83,920.28 2760.83,497.05 2854.33,403.54 2854.33,285.43 2810.04,241.14
NetC48_3_2: C48_3.2 CN2_3.T | length 186.4
  Bottom Layer w20: CN2_3.T@2257.49,1036.28 2257.49,1136.81 C48_3.2@2343.32,1136.81
NetC48_4_1: C48_4.1 SW3_4.5 | length 1367.5
  Bottom Layer w10: 3734.61,1136.81 3739.61,1131.81 3739.61,1092.55 3740.16,1092.01 3740.16,979.33 ; 3848.43,34.45 3853.35,29.53 3897.64,29.53 SW3_4.5@3897.64,80.71
  Bottom Layer w15: 3848.43,34.45 3848.43,241.14
  Bottom Layer w20: C48_4.1@3655.7,1136.81 3734.61,1136.81 ; 3740.16,979.33 3799.21,920.28 3799.21,497.05 3892.72,403.54 3892.72,285.43 3848.43,241.14
NetC48_4_2: C48_4.2 CN2_4.T | length 186.4
  Bottom Layer w20: CN2_4.T@3295.87,1036.28 3295.87,1136.81 C48_4.2@3381.7,1136.81
NetC48_5_1: C48_5.1 SW3_5.5 | length 1367.5
  Bottom Layer w10: 4773,1136.81 4778,1131.81 4778,1092.55 4778.54,1092.01 4778.54,979.33 ; 4886.81,34.45 4891.73,29.53 4936.02,29.53 SW3_5.5@4936.02,80.71
  Bottom Layer w15: 4886.81,34.45 4886.81,241.14
  Bottom Layer w20: C48_5.1@4694.09,1136.81 4773,1136.81 ; 4778.54,979.33 4837.6,920.28 4837.6,497.05 4931.1,403.54 4931.1,285.43 4886.81,241.14
NetC48_5_2: C48_5.2 CN2_5.T | length 186.4
  Bottom Layer w20: CN2_5.T@4334.26,1036.28 4334.26,1136.81 C48_5.2@4420.09,1136.81
NetC48_6_1: C48_6.1 SW3_6.5 | length 1367.5
  Bottom Layer w10: 5811.39,1136.81 5816.39,1131.81 5816.39,1092.55 5816.93,1092.01 5816.93,979.33 ; 5925.2,34.45 5930.12,29.53 5974.41,29.53 SW3_6.5@5974.41,80.71
  Bottom Layer w15: 5925.2,34.45 5925.2,241.14
  Bottom Layer w20: C48_6.1@5732.47,1136.81 5811.39,1136.81 ; 5816.93,979.33 5875.98,920.28 5875.98,497.05 5969.49,403.54 5969.49,285.43 5925.2,241.14
NetC48_6_2: C48_6.2 CN2_6.T | length 186.4
  Bottom Layer w20: CN2_6.T@5372.65,1036.28 5372.65,1136.81 C48_6.2@5458.47,1136.81
NetC49_1_1: C49_1.1 R23_1.2 U2.22 | length 1067.2
  Top Layer w20: v1(113.19,1751.97) 536.42,2175.2 536.42,2288.39
  Bottom Layer w10: 157.48,1707.68 162.4,1702.76 162.4,1609.25 211.61,1560.04 211.61,1535.43
  Bottom Layer w20: v1(113.19,1751.97) 157.48,1707.68 ; C49_1.1@164.61,1535.43 211.61,1535.43 R23_1.2@262.8,1535.43
NetC49_2_1: C49_2.1 R23_2.2 U2.58 | length 1067.2
  Top Layer w20: v1(1151.57,1751.97) 1574.8,2175.2 1574.8,2288.39
  Bottom Layer w10: 1195.87,1707.68 1200.79,1702.76 1200.79,1609.25 1250,1560.04 1250,1535.43
  Bottom Layer w20: v1(1151.57,1751.97) 1195.87,1707.68 ; C49_2.1@1203,1535.43 1250,1535.43 R23_2.2@1301.18,1535.43
NetC49_3_1: C49_3.1 R23_3.2 U2.26 | length 1067.2
  Top Layer w20: v1(2194.88,1751.97) 2618.11,2175.2 2618.11,2288.39
  Bottom Layer w10: 2239.17,1707.68 2244.09,1702.76 2244.09,1609.25 2293.31,1560.04 2293.31,1535.43
  Bottom Layer w20: v1(2194.88,1751.97) 2239.17,1707.68 ; C49_3.1@2246.31,1535.43 2293.31,1535.43 R23_3.2@2344.49,1535.43
NetC49_4_1: C49_4.1 R23_4.2 U2.27 | length 1067.2
  Top Layer w20: v1(3233.27,1751.97) 3656.5,2175.2 3656.5,2288.39
  Bottom Layer w10: 3277.56,1707.68 3282.48,1702.76 3282.48,1609.25 3331.69,1560.04 3331.69,1535.43
  Bottom Layer w20: v1(3233.27,1751.97) 3277.56,1707.68 ; C49_4.1@3284.69,1535.43 3331.69,1535.43 R23_4.2@3382.87,1535.43
NetC49_5_1: C49_5.1 R23_5.2 U2.55 | length 1067.2
  Top Layer w20: v1(4271.65,1751.97) 4694.88,2175.2 4694.88,2288.39
  Bottom Layer w10: 4315.94,1707.68 4320.87,1702.76 4320.87,1609.25 4370.08,1560.04 4370.08,1535.43
  Bottom Layer w20: v1(4271.65,1751.97) 4315.94,1707.68 ; C49_5.1@4323.08,1535.43 4370.08,1535.43 R23_5.2@4421.26,1535.43
NetC49_6_1: C49_6.1 R23_6.2 U2.25 | length 1067.2
  Top Layer w20: v1(5310.04,1751.97) 5733.27,2175.2 5733.27,2288.39
  Bottom Layer w10: 5354.33,1707.68 5359.25,1702.76 5359.25,1609.25 5408.46,1560.04 5408.46,1535.43
  Bottom Layer w20: v1(5310.04,1751.97) 5354.33,1707.68 ; C49_6.1@5361.46,1535.43 5408.46,1535.43 R23_6.2@5459.65,1535.43
NetC50_1_1: C50_1.1 R22_1.1 SW4_1.2 U2.59 | length 2358
  Top Layer w20: v2(213.7,1335.75) 378.94,1500.98 378.94,1938.98 585.63,2145.67 585.63,2293.31
  Bottom Layer w10: SW4_1.2@240.55,397.64 241.14,398.23 241.14,600.39
  Bottom Layer w20: C50_1.1@164.61,1446.85 213.7,1446.85 ; 241.14,600.39 108.27,733.27 108.27,1230.32 v2(213.7,1335.75) 213.7,1446.85 ; R22_1.1@262.8,1446.85 213.7,1446.85
NetC50_2_1: C50_2.1 R22_2.1 SW4_2.2 U2.23 | length 2378.8
  Top Layer w20: v2(1252.09,1335.75) 1417.32,1500.98 1417.32,1924.21 1638.78,2145.67 1638.78,2308.07
  Bottom Layer w10: SW4_2.2@1278.94,397.64 1279.53,398.23 1279.53,600.39
  Bottom Layer w20: C50_2.1@1203,1446.85 1252.09,1446.85 ; 1279.53,600.39 1146.65,733.27 1146.65,1230.32 v2(1252.09,1335.75) 1252.09,1446.85 ; R22_2.1@1301.18,1446.85 1252.09,1446.85
NetC50_3_1: C50_3.1 R22_3.1 SW4_3.2 U2.57 | length 2489.9
  Top Layer w20: v2(2295.4,1335.75) 2460.63,1500.98 2460.63,1924.21 2682.09,2145.67 2682.09,2308.07
  Bottom Layer w10: SW4_3.2@2322.24,397.64 2322.83,398.23 2322.83,600.39
  Bottom Layer w20: C50_3.1@2246.31,1446.85 2295.4,1446.85 ; 2322.83,600.39 2189.96,733.27 2189.96,1230.32 v2(2295.4,1335.75) ; R22_3.1@2344.49,1446.85 2295.4,1446.85 ; v2(2295.4,1335.75) 2295.4,1446.85 ; v2(2295.4,1335.75) 2295.4,1446.85